# EAGLE board CRTFlybackdriverJustCopper19XX (EAGLE 5.10)
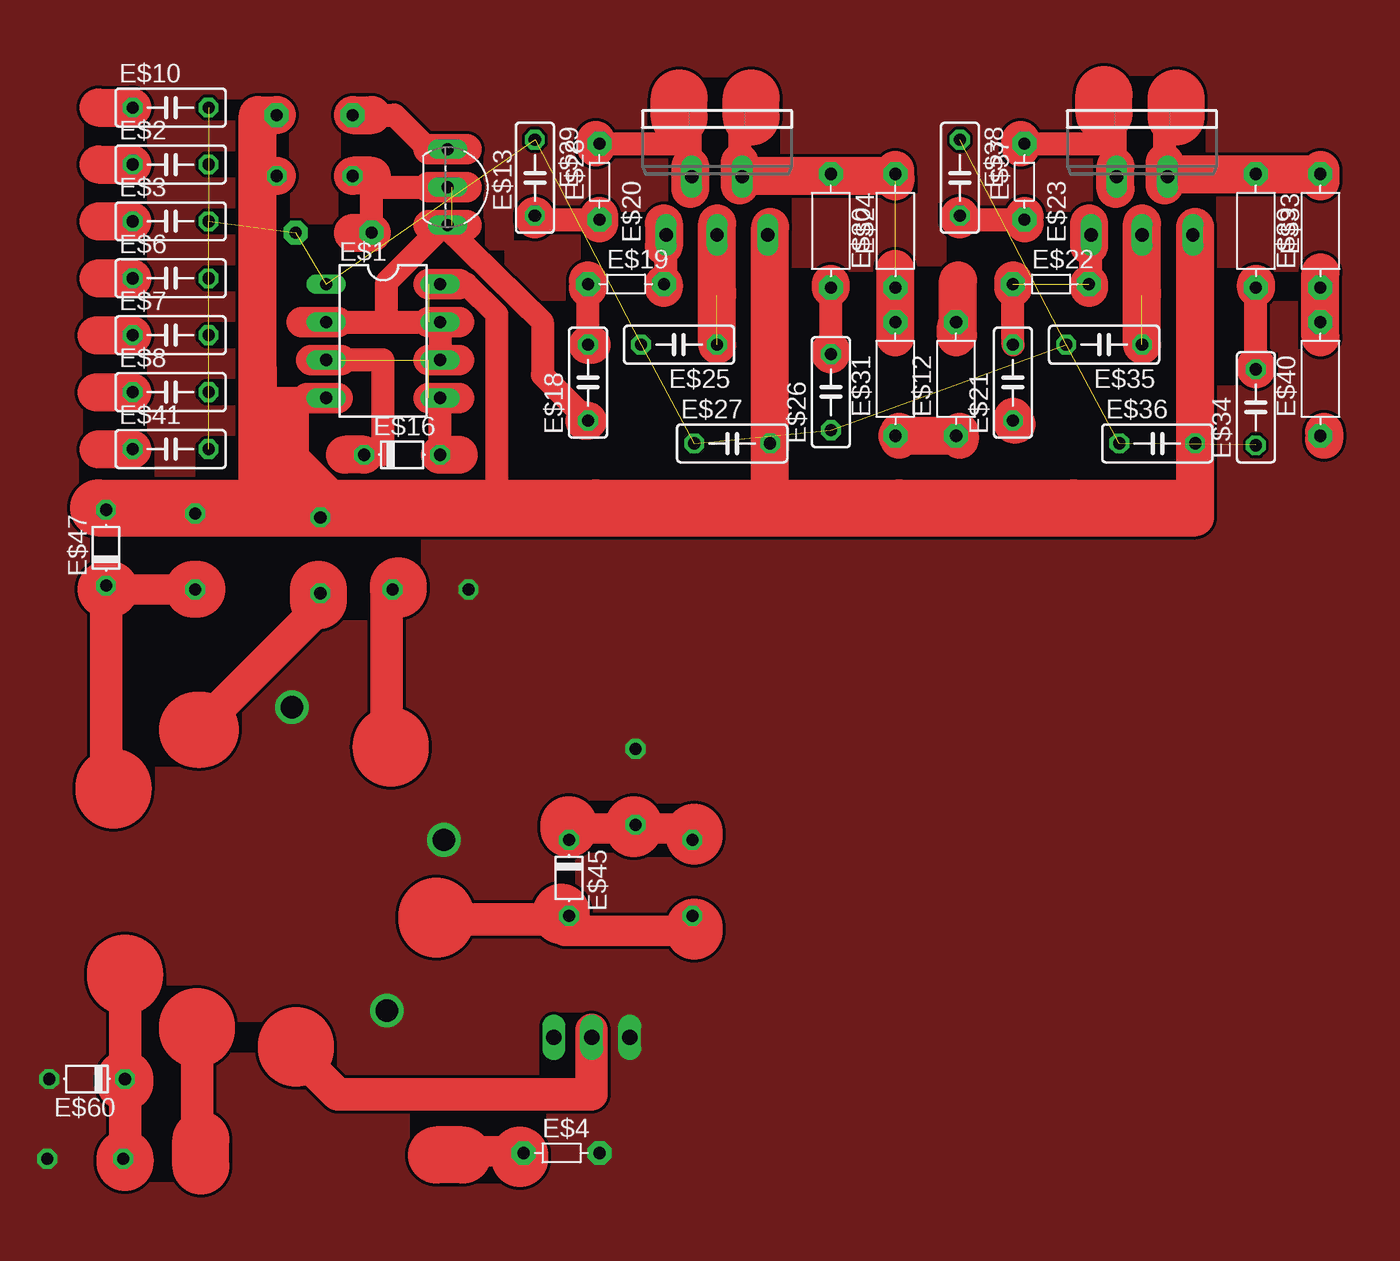
[diagram p0: board, top side]
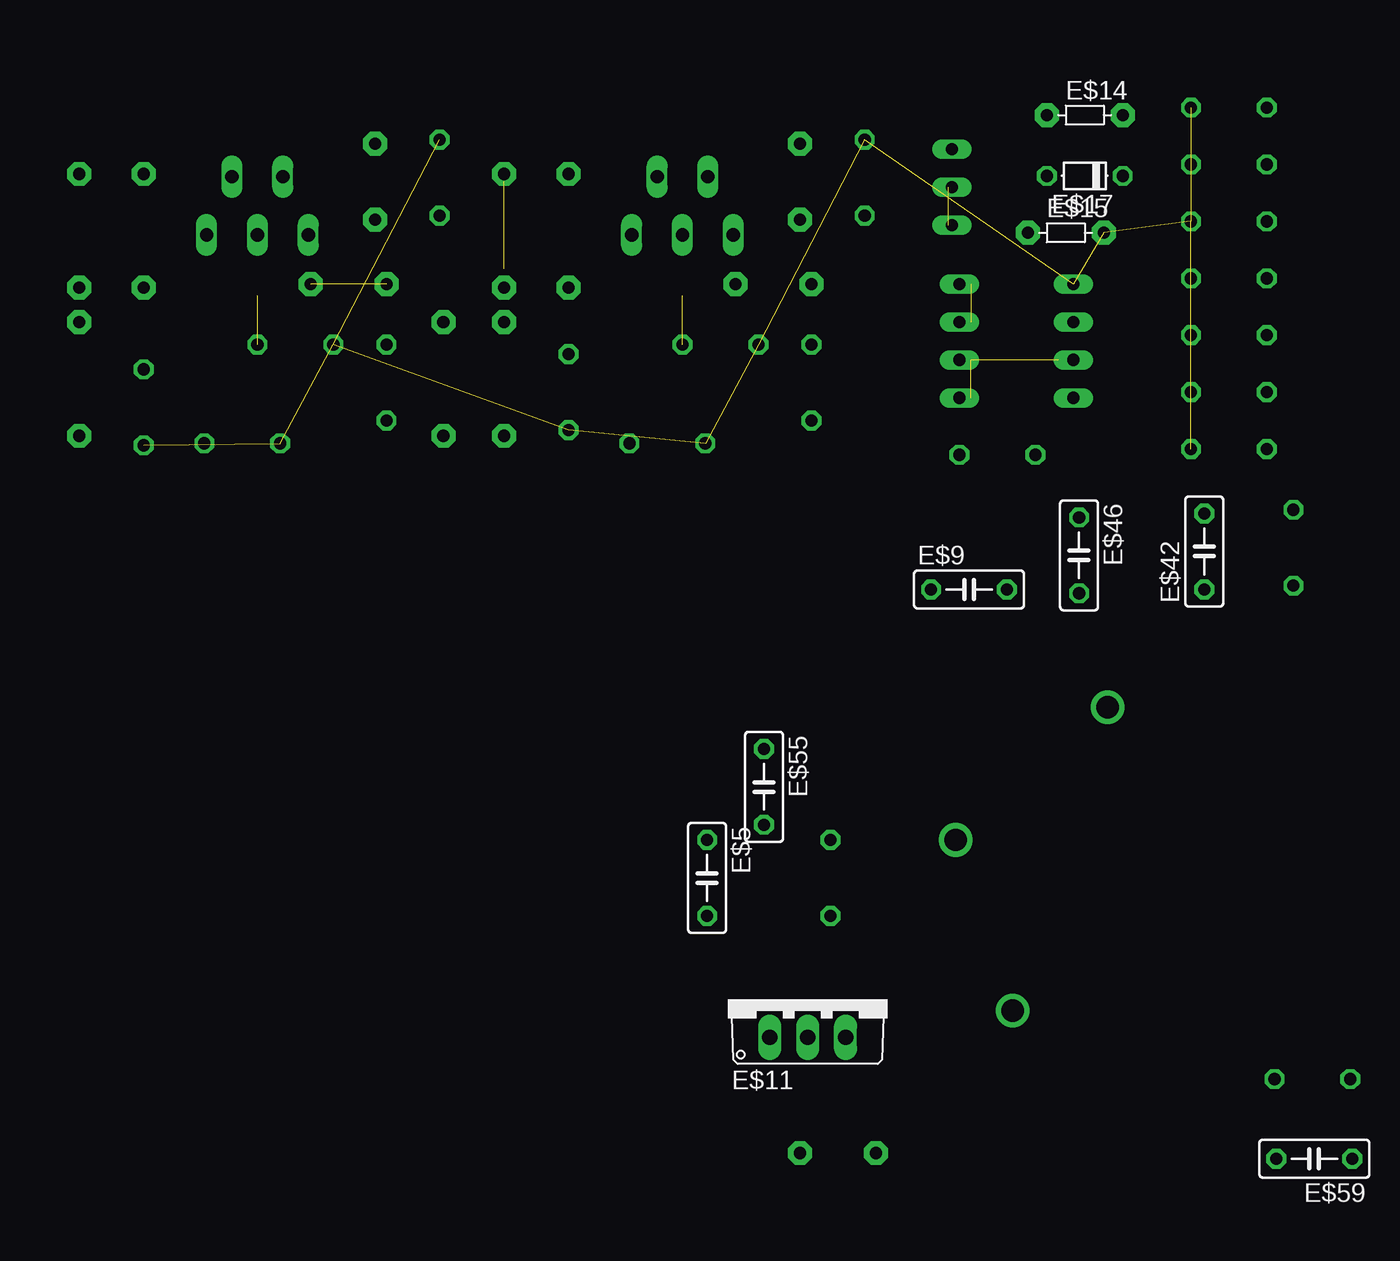
[diagram p1: board, bottom side, seen from below]

No outline drawn. Coordinates in mm, seen from the top.
Copper layers (1*16): Top 0.035mm / dielectric 1.5mm / Bottom 0.035mm
Design rules "default": minimum track width 10mil, minimum drill 24mil, track to track 8mil, track to pad 8mil, pad to pad 8mil, via to via 8mil, smd to smd 8mil, copper to edge 40mil, drill to drill 8mil, minimum pad ring 10mil, minimum via ring 8mil, stop-mask expansion 4mil, vias tented up to drill 0mil, thermal gap 10mil

## Footprints (pad centres in the part's own frame; a part is rotated, then mirrored left to right if it is on the bottom)
DIL08 = drill 0.813 long: 1 -3.81,-3.81; 2 -1.27,-3.81; 3 1.27,-3.81; 4 3.81,-3.81; 5 3.81,3.81; 6 1.27,3.81; 7 -1.27,3.81; 8 -3.81,3.81
C050-025X075 = drill 0.813 octagon: 1 -2.54,0; 2 2.54,0
R-5 = drill 0.813 pad 1.6 octagon: 1 -2.54,0; 2 2.54,0
TO220V = drill 1.016 long: 1 -2.54,-2.54; 2 0,-2.54; 3 2.54,-2.54
R-7,5 = drill 0.813 pad 1.6 octagon: 1 -3.81,0; 2 3.81,0
TO92-BEC = drill 0.813 long: B -2.54,0; C 2.54,0; E 0,0
D-5 = drill 0.813 octagon: A 2.54,0; C -2.54,0
TO220511 = drill 0.9 long: 1 -3.4,-8.4; 2 -1.7,-4.5; 3 0,-8.4; 4 1.7,-4.5; 5 3.4,-8.4

## Placement (x,y rotation side)
E$1  [DIL08]  38.86,60.07 270 top
E$2  [C050-025X075]  24.64,71.88 0 top
E$3  [C050-025X075]  24.64,68.07 0 top
E$4  [R-5]  50.8,5.71 0 top
E$5  [C050-025X075]  59.56,24.13 270 bottom
E$6  [C050-025X075]  24.64,64.26 0 top
E$7  [C050-025X075]  24.64,60.45 0 top
E$8  [C050-025X075]  24.64,56.64 0 top
E$9  [C050-025X075]  42.04,43.43 0 bottom
E$10  [C050-025X075]  24.64,75.69 0 top
E$11  [TO220V]  52.83,16 0 bottom
E$12  [R-7,5]  77.22,57.53 90 top
E$13  [TO92-BEC]  43.18,70.36 270 top
E$14  [R-5]  34.29,75.18 0 bottom
E$15  [R-5]  35.56,67.31 0 bottom
E$16  [D-5]  40.13,52.45 0 top
E$17  [D-5]  34.29,71.12 180 bottom
E$18  [C050-025X075]  52.58,57.28 90 top
E$19  [R-5]  55.12,63.88 0 top
E$20  [TO220511]  61.21,75.56 0 top
E$21  [C050-025X075]  81.03,57.28 90 top
E$22  [R-5]  83.57,63.88 0 top
E$23  [TO220511]  89.66,75.56 0 top
E$24  [R-7,5]  68.83,67.44 270 top
E$25  [C050-025X075]  58.67,59.82 180 top
E$26  [C050-025X075]  68.83,56.64 90 top
E$27  [C050-025X075]  62.23,53.21 0 top
E$28  [R-5]  53.34,70.74 90 top
E$29  [C050-025X075]  49.02,70.99 270 top
E$30  [R-7,5]  73.15,67.44 90 top
E$31  [R-7,5]  73.15,57.53 90 top
E$33  [R-7,5]  97.28,67.44 270 top
E$34  [C050-025X075]  97.28,55.63 90 top
E$35  [C050-025X075]  87.12,59.82 180 top
E$36  [C050-025X075]  90.68,53.21 0 top
E$37  [R-5]  81.79,70.74 90 top
E$38  [C050-025X075]  77.47,70.99 270 top
E$39  [R-7,5]  101.6,67.44 90 top
E$40  [R-7,5]  101.6,57.53 90 top
E$41  [C050-025X075]  24.64,52.83 0 top
E$42  [C050-025X075]  26.29,45.97 90 bottom
E$45  [D-5]  51.31,24.13 270 top
E$46  [C050-025X075]  34.67,45.72 270 bottom
E$47  [D-5]  20.32,46.23 90 top
E$55  [C050-025X075]  55.75,30.23 270 bottom
E$59  [C050-025X075]  18.92,5.33 180 bottom
E$60  [D-5]  19.05,10.67 180 top

## Library data of the parts
E$1 = ic-package
E$2 E$3 E$5-E$10 E$18 E$21 E$25-E$27 E$29 E$34-E$36 E$38 E$41 E$42 E$46 E$55 E$59 = rcl
E$4 E$12 E$14 E$15 E$19 E$22 E$24 E$28 E$30 E$31 E$33 E$37 E$39 E$40 = discrete
E$11 = linear
E$13 = transistor
E$16 E$17 E$45 E$47 E$60 = diode
E$20 E$23 = ref-packages

## Nets
GND: E$4.2 E$9.1 E$11.1 E$55.1 E$59.1 E$60.A
GND1: E$1.1 E$2.2 E$3.2 E$6.2 E$7.2 E$8.2 E$10.2 E$15.2 E$25.2 E$26.1 E$27.1 E$29.1 E$34.1 E$35.2 E$36.1 E$38.1 E$41.2
S$1: E$6.1
S$7: E$8.1
S$8: E$7.1
S$10: E$3.1
S$11: E$2.1
S$12: E$33.1 E$39.2
S$19: E$34.2
S$25: E$1.5 E$16.A
S$26: E$1.3 E$16.C
S$29: E$1.8
S$36: E$24.1 E$30.2
S$40: E$26.2
S$45: E$1.2 E$1.6 E$1.7 E$13.C
S$53: E$10.1
S$70: E$21.2 E$22.1
S$81: E$18.2 E$19.1
S$83: E$41.1
S$90: E$1.4

## Tracks (layer width: path | path; a pad name or v marks a point on that pad's centre or on a via)
GND  (via drill 1.5)
  other vias: 39.12,15.24 42.93,26.67 32.77,35.56
  pour Top (rank 6, no thermals): -0.76,-20.07 -0.25,91.69 153.42,91.69 152.91,-20.07
GND1  (16 unrouted)
S$1
  Top 2.54: 19.81,64.26 E$6.1
S$2
  Top 2.032: 21.59,43.43 26.16,43.43
S$3
  Top 5.08: 26.42,34.04 26.67,34.04
S$4
  Top 2.032: 51.82,27.43 59.18,27.43
S$5
  Top 1.524: 61.21,59.82 61.21,67.69
S$6
  Top 2.54: 64.77,48.9 64.77,67.69 | 31.5,48.9 30.73,48.9 | 92.2,48.9 92.71,48.9
  Top 3.81: 31.5,48.9 53.09,48.9 | 53.09,48.9 64.77,48.9 73.41,48.9 | 73.41,48.9 92.2,48.9 | 19.81,48.9 53.09,48.9 | 73.41,48.9 85.09,48.9
S$7
  Top 2.54: 19.68,56.64 E$8.1
S$8
  Top 2.54: 19.68,60.45 E$7.1
S$9
  Top 3.81: 26.42,43.43 26.16,43.43
S$10
  Top 2.54: 19.81,68.07 E$3.1
S$11
  Top 2.54: 19.81,71.88 E$2.1
S$12
  Top 1.524: 91.44,71.25 91.57,71.25 E$33.1 E$39.2
  Top 2.54: E$39.2 101.6,71.5 | E$39.2 101.6,70.74 | 91.57,71.25 E$39.2
S$13
  Top 1.524: 93.22,53.21 93.22,48.64 58.67,48.64
S$14
  Top 1.524: 89.66,59.82 89.66,67.69
S$15
  Top 1.524: 93.22,52.7 93.22,67.44
S$16
  Top 1.524: 91.19,70.48 91.19,76.58
S$17
  Top 2.032: 44.45,5.84 48.01,5.84
S$18
  Top 2.54: 101.85,53.98 101.85,53.47
S$19
  Top 1.524: 97.28,58.42 97.28,63.63
  Top 2.54: E$34.2 97.28,58.42 | 97.28,63.63 97.28,63.88
S$20
  Top 1.524: 81.53,73.28 87.63,73.28
  Top 2.54: 81.53,73.03 81.53,73.28 81.53,73.53
S$22
  Top 2.032: 33.78,56.26 35.81,56.26
S$23
  Top 2.032: 33.78,61.34 35.81,61.34
S$24
  Top 1.524: 41.91,72.9 39.62,75.18 36.83,75.18
  Top 2.032: 41.91,72.9 44.45,72.9
  Top 2.54: 36.83,75.18 38.1,75.18
S$25
  Top 1.524: E$16.A E$1.5
  Top 2.54: E$16.A 43.94,52.45
S$26
  Top 1.524: E$16.C 38.86,52.45 38.86,58.8 E$1.3
  Top 2.54: E$16.C 36.32,52.45
S$27
  Top 1.524: 21.59,10.67 21.34,17.78
  Top 2.184: 21.59,10.67 21.59,17.78 | 21.59,5.33 21.59,10.41
  Top 3.81: 21.59,17.78 21.34,17.53 | 21.59,10.41 21.59,10.67 | 21.59,5.33 21.59,5.08
  Top 5.08: 21.59,17.78 21.59,17.53
S$28
  Top 1.524: 30.48,75.18 30.48,71.12
  Top 2.54: 31.75,75.18 30.48,75.18 30.48,48.26 34.29,48.26 | 30.48,71.12 31.75,71.12
S$29  (1 unrouted)
  Top 1.524: E$1.8 43.18,63.88 44.45,63.88 46.48,61.85 46.48,48.64 64.77,48.64 64.77,53.21
  Top 2.032: 41.91,61.34 43.94,61.34 | 41.91,63.88 43.18,63.88 43.94,63.88
S$30
  Top 1.524: 57.78,63.63 57.78,67.94
S$31
  Top 1.524: 64.77,52.7 64.77,67.44
S$32
  Top 1.524: 62.74,70.48 62.74,76.33
S$33
  Top 1.524: 59.44,70.48 59.44,77.09
S$34
  Top 1.524: 59.44,75.06 59.44,75.31
S$35
  Top 2.54: 57.66,67.94 57.66,66.42
S$36
  Top 1.524: 62.99,71.25 E$24.1 E$30.2
S$37
  Top 2.54: 59.44,70.23 59.44,71.75
S$38
  Top 1.524: 48.77,68.2 53.34,68.2
S$39
  Top 3.81: 63.5,75.06 63.5,76.33
S$40
  Top 1.524: 68.83,59.44 68.83,63.63
  Top 2.54: E$26.2 68.83,59.44 | 68.83,63.63 68.83,63.88
S$41
  Top 1.524: 53.09,73.28 59.18,73.28
  Top 2.54: 53.09,73.03 53.09,73.28 53.09,73.53
S$42
  Top 2.54: 53.34,67.94 53.34,68.45
S$43  (1 unrouted)
  Top 1.524: 73.15,61.09 73.15,63.88
  Top 2.54: 73.15,60.33 73.15,61.09 73.15,64.9 | 73.15,63.88 73.15,64.64 | 73.15,71.12 73.15,71.5 | 73.15,71.12 73.15,70.74 | 63.12,71.12 73.15,71.12
S$44
  Top 1.524: 77.47,53.72 73.41,53.72
  Top 2.54: 73.41,53.98 73.41,53.72 73.41,53.47 | 77.47,53.72 77.47,53.98 | 77.47,53.72 77.47,53.47 | 73.28,53.72 77.47,53.72
S$45
  Top 1.524: 41.91,58.8 E$1.6 E$1.7 39.12,61.34 | 39.12,61.34 E$1.2 33.27,61.34 | 39.12,61.34 39.12,64.01 42.93,67.82 49.53,61.34 49.53,57.78 52.58,54.74
  Top 2.032: 41.91,67.82 42.93,67.82 E$13.C
  Top 2.54: 52.58,54.74 52.32,54.74
S$46  (1 unrouted)
  Top 1.524: 38.1,67.31 38.1,70.36 | 38.1,70.36 38.1,71.12 | 38.1,70.36 43.43,70.36
  Top 2.032: 44.45,70.36 43.43,70.36 41.91,70.36 | 43.43,67.82 44.45,67.82
  Top 2.54: 38.1,71.12 36.83,71.12 | 36.83,67.31 38.1,67.31
S$47  (1 unrouted)
  Top 2.54: 61.21,59.82 61.21,67.94 | 61.21,63.12 61.21,63.37
S$48
  Top 2.54: 62.74,70.48 62.74,72.01
S$49  (2 unrouted)
  Top 2.032: 41.91,56.26 43.94,56.26 | 41.91,58.8 43.94,58.8 | 34.04,58.8 36.07,58.8
S$50
  Top 2.54: 64.77,52.96 64.77,53.21
S$51
  Top 2.54: 52.58,64.14 52.58,63.63
S$52
  Top 2.54: 49.02,68.2 49.02,68.45
S$53
  Top 2.54: 19.81,75.69 E$10.1
S$54
  Top 2.54: 19.81,71.88 22.1,71.88
S$55
  Top 2.54: 19.81,68.07 22.1,68.07
S$56
  Top 2.54: 19.81,64.26 22.1,64.26
S$57
  Top 2.54: 19.68,60.45 22.1,60.45
S$58
  Top 2.54: 19.68,56.64 22.1,56.64
S$59
  Top 2.032: 34.8,61.34 33.4,61.34
S$60
  Top 3.81: 58.67,75.06 58.67,76.33
S$61
  Top 3.81: 91.95,75.06 91.95,76.33
S$62
  Top 3.81: 87.12,75.31 87.12,76.58
S$63
  Top 1.524: 77.22,68.2 81.79,68.2
S$64
  Top 2.54: 77.22,60.33 77.22,61.09
S$65
  Top 2.54: 86.11,67.94 86.11,66.42
S$66  (1 unrouted)
  Top 2.54: 89.66,63.12 89.66,63.37 | 89.66,59.82 89.66,67.94
S$67
  Top 2.54: 93.22,67.69 93.22,48.26 90.17,48.26
S$68
  Top 2.54: 91.19,70.48 91.19,72.01
S$69
  Top 2.54: 87.88,70.23 87.88,71.75
S$70  (1 unrouted)
  Top 1.524: E$21.2 E$22.1
  Top 2.54: 86.11,63.88 86.11,63.63
S$71
  Top 1.524: 86.23,63.63 86.23,67.94
S$72
  Top 2.54: 101.6,60.33 101.6,64.64
S$73
  Top 1.524: 87.88,70.48 87.88,77.34
S$74
  Top 1.524: 87.88,76.58 87.88,76.83
S$75
  Top 2.54: 93.22,52.96 93.22,53.21
S$77
  Top 2.54: 81.03,64.14 81.03,63.63
S$78
  Top 2.54: 81.79,67.94 81.79,68.45
S$79
  Top 2.54: 77.47,68.2 77.47,68.45
S$80
  Top 2.54: 81.03,54.99 81.03,54.48 81.28,54.48
S$81
  Top 1.524: E$18.2 E$19.1
  Top 2.54: E$18.2 52.83,59.82
S$82
  Top 3.81: 39.88,43.69 39.88,43.43
S$83
  Top 2.54: 19.81,52.83 E$41.1
S$85
  Top 2.54: 57.66,63.88 57.66,63.63
S$86
  Top 2.184: 39.37,33.27 39.12,33.02 39.12,43.18
  Top 3.81: 39.12,32.77 39.12,33.02
S$87
  Top 2.54: 32.64,50.55 32.64,55.37
S$88
  Top 2.184: 52.83,13.97 52.83,9.65 35.81,9.65 32.77,12.7
S$89
  Top 2.54: 77.34,60.45 77.34,64.14
S$90
  Top 1.524: 30.48,71.12 30.48,58.17 30.48,56.26 | 30.48,56.26 E$1.4 | 30.48,48.64 30.48,56.26
  Top 2.54: 31.75,51.69 34.04,49.4 35.43,49.4 30.48,54.36 30.48,58.17
S$91
  Top 3.81: 59.69,26.92 59.69,27.18
S$92
  Top 2.184: 26.42,34.04 34.54,42.16
S$93
  Top 2.184: 51.31,27.69 51.31,28.19 | 51.31,26.67 51.31,27.43
  Top 3.81: 51.31,27.43 51.31,27.69
S$94
  Top 3.81: 26.67,4.83 26.67,6.6
S$95
  Top 2.184: 20.32,30.73 20.32,43.94
S$96
  Top 3.81: 48.01,5.33 48.01,5.59
S$101
  Top 2.032: 51.05,20.57 59.69,20.57
  Top 3.81: 59.69,20.57 59.69,20.83
S$102
  Top 3.81: 34.54,42.67 34.54,43.43
S$110
  Top 2.184: 26.42,6.35 26.42,13.97
  Top 5.08: 26.42,13.97 26.42,14.22
S$111
  Top 2.184: 42.67,21.34 50.29,21.34
  Top 3.81: 42.67,21.34 42.67,21.59
S$116
  Top 3.81: 20.32,43.43 20.57,43.43
S$119
  Top 3.81: 55.63,27.69 55.63,27.43
S$121
  Top 3.81: 50.8,21.59 50.8,21.84
S$129
  Top 5.08: 33.02,12.95 33.02,12.7
S$130
  Top 5.08: 42.42,21.59 42.42,21.34
S$131
  Top 5.08: 39.37,32.77 39.37,33.02
S$132
  Top 5.08: 20.83,30.23 20.83,29.97
S$133
  Top 3.81: 44.2,5.59 42.42,5.59

## Text on the board
Unrouted: gnd | 10nf | 3.4v zener | 22uf | 700 | 22uf | 700 | Vcc | 20nf | 2.2k | output | gnd | 2n3906 | 2 | 2 | 2 | 2 | gnd | 40nf | -vcc | -vcc | V deflector | 60nf | vcc | output | gnd | 80nf | 220uF | 2 | 2 | 220uF | 2 | vcc | Ainput | gnd | H deflector | 100nf | gnd | opa2134 | output | output | gnd | gnd | gnd | 10nf | in4009 | 220uF | 220uF | + | 40nf | 220uF | 10pF | IN4004 | 22nF | 8 | 7 | 9 | 220uF | 10 | 6 | D603 | C616 | 1nF | 1N4004 | 5 | 1 | 4 | Q602 | NPN | 3 | 2 | B | C | E | D601 | IN4004 | - | Yellow | Heater | blue | C614 | 22nF